# EAGLE board ES_Daisy_Field_Rev4 (EAGLE 9.6.1), part 1 of 2
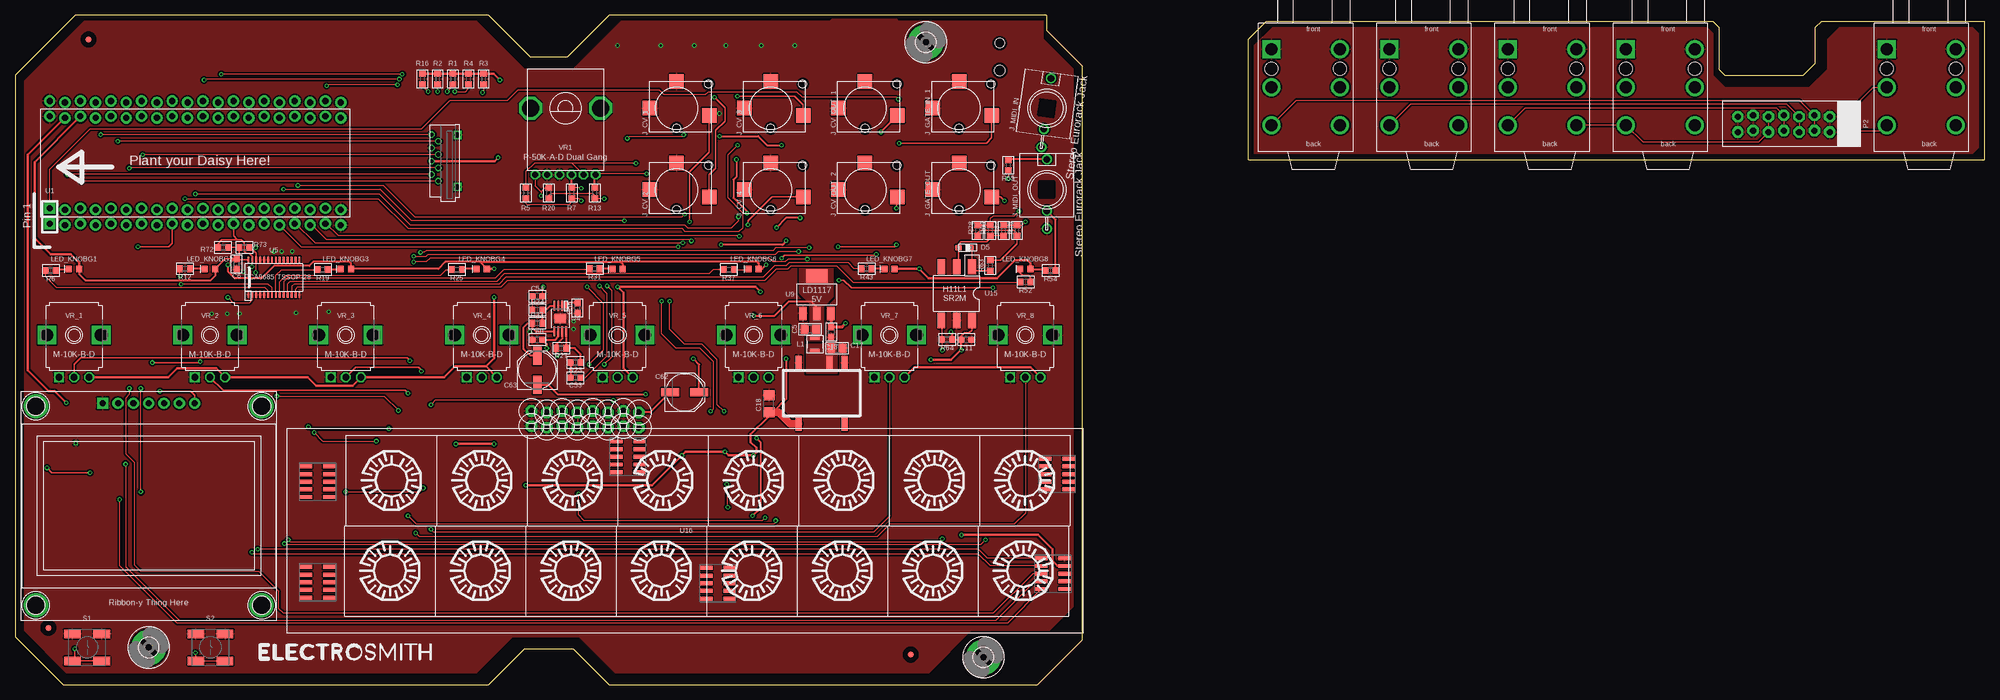
[diagram p0: board, top side]
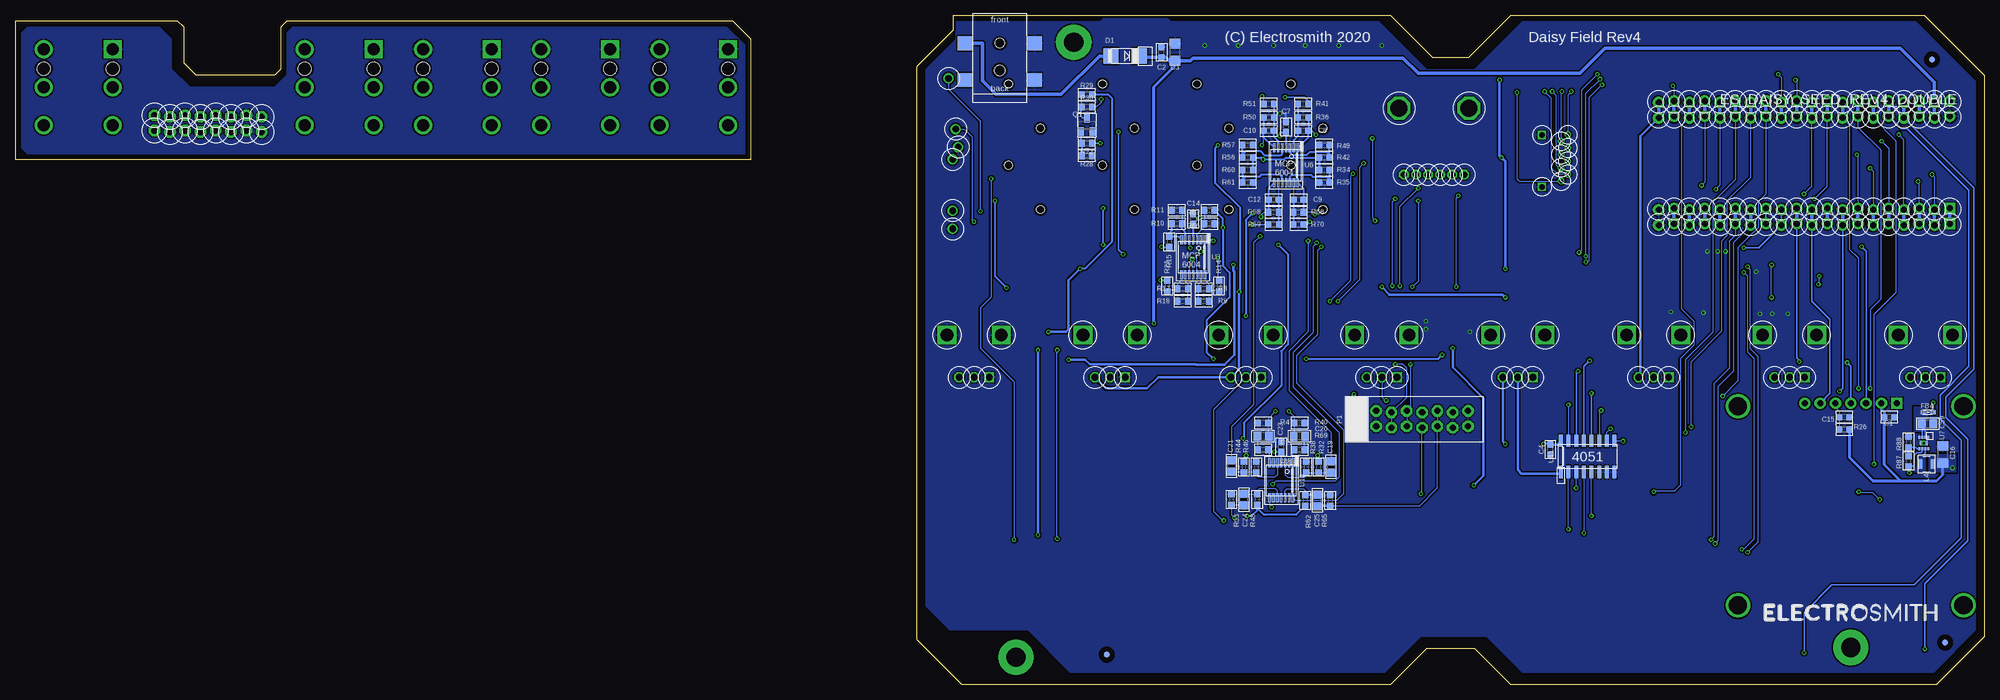
[diagram p1: board, bottom side, seen from below]

Size 326.5 x 111 mm. Coordinates in mm from the lower left corner, seen from the top.
Outline: 0,101 0,8 8,0 78.5,0 84.5,6 92.5,6 98.5,0 169.5,0 177,7.5 177,102.5 171,108.5 171,111 98.5,111 91.5,104 85.5,104 78.5,111 10,111 0,101
Outline: 204.5,87 326.5,87 326.5,110 299.5,110 298.5,109 298.5,103 296.5,101 283.5,101 282.5,102 282.5,109 281.5,110 207.5,110 204.5,107 204.5,87
Copper layers (1*16): Top 0.0356mm / dielectric 1.5011mm / Bottom 0.0356mm
Design rules "ES_DRC_MaskedVias": minimum track width 6mil, minimum drill 13mil, track to track 6mil, track to pad 6mil, pad to pad 6mil, via to via 6mil, smd to smd 6mil, copper to edge 15mil, drill to drill 6mil, minimum pad ring 7mil, minimum via ring 7mil, stop-mask expansion 3mil, vias tented up to drill 16mil, thermal gap 10mil
Net classes: 0 DEFAULT: width 0.102 mm, drill 0.2 mm, clearance 0.102 mm; 1 POWER: width 0.102 mm, drill 0.2 mm, clearance 0.102 mm

## Footprints (pad centres in the part's own frame; a part is rotated, then mirrored left to right if it is on the bottom)
C0603 = smd 1.1 x 1: 1 -0.85,0; 2 0.85,0
C1206 = smd 1.6 x 1.8: 1 -1.4,0; 2 1.4,0
C0805 = smd 1.3 x 1.5: 1 -0.95,0; 2 0.95,0
PANASONIC_D = smd 3 x 1.4: + 2.4,0; - -2.4,0
SMADIODE = smd 2.54 x 2.54: A 2.349,0; C -2.349,0
SOD-323F = smd 1 x 0.8: A 1,0; C -1,0
WUERTH-ELEKTRONIK_0603 = smd 0.85 x 0.7: 1 -0.9,0; 2 0.7,0
FIDUCIAL_1MM = smd 1 x 1: 1 0,0
32-PAD = drill 3.2 pad 5.842: B3,2 0,0
WQP-DC0500 = smd 2.3 x 2.5: 1 3.7,5.75; 2 3.7,-5.75; 3 -2.4,-5.75; 4 -2.4,5.75 | hole 1.6: -2.4,0 | hole 1.8: 2.1,0
WQP-PJ6110 = drill 2 square: 1 -6.35,-7 | drill 2: 2 6.25,-7; 3 -0.05,-7; 4 -6.35,4.4; 5 6.25,4.4; 6 -0.05,4.4 | hole 2.2: -3.1,4.4; -3.1,-7
SMT_JACK = smd 2.4 x 2.4: 1 -4.4,0; 2 0,4.4; 3 5.4,-1.2 | hole 1.35: 5.307,4.01; 0,-3.302
STEREO_JACK_3.5MM = drill 1.1: GND 0,-6.5; RING 0,-3.5; TIP 0,5
BOURNS_SRP2010 = smd 0.559 x 1.6: P$1 -1.003,0; P$2 1.003,0
DIODE_0603 = smd 1 x 1.1: ANODE 0.85,0; CATHODE -0.85,0
2X8_LOCK = drill 1.016 pad 1.88 octagon: 1 -1.397,8.89; 2 1.143,8.89; 3 -1.143,6.35; 4 1.397,6.35; 5 -1.397,3.81; 6 1.143,3.81; 7 -1.143,1.27; 8 1.397,1.27; 9 -1.397,-1.27; 10 1.143,-1.27; 11 -1.143,-3.81; 12 1.397,-3.81; 13 -1.397,-6.35; 14 1.143,-6.35; 15 -1.143,-8.89; 16 1.397,-8.89
SOT23-BEC = smd 1 x 1.4: B -0.95,-1.1; C 0,1.1; E 0.95,-1.1
R0603 = smd 1 x 1.1: 1 -0.85,0; 2 0.85,0
TL3301SPF160QJ = smd 2.794 x 1.397: 1 -2.413,-2.248; 2 2.413,-2.248; 3 -2.413,2.248; 4 2.413,2.248
ES_DAISY_SEED_DOUBLE = drill 1.016 pad 1.88 square: 1 -7.493,24.13; B1 -10.033,24.13 | drill 1.016 pad 1.88: 2 -7.747,21.59; 3 -7.493,19.05; 4 -7.747,16.51; 5 -7.493,13.97; 6 -7.747,11.43; 7 -7.493,8.89; 8 -7.747,6.35; 9 -7.493,3.81; 10 -7.747,1.27; 11 -7.493,-1.27; 12 -7.747,-3.81; 13 -7.493,-6.35; 14 -7.747,-8.89; 15 -7.493,-11.43; 16 -7.747,-13.97; 17 -7.493,-16.51; 18 -7.747,-19.05; 19 -7.493,-21.59; 20 -7.747,-24.13; 21 7.493,-24.13; 22 7.747,-21.59; 23 7.493,-19.05; 24 7.747,-16.51; 25 7.493,-13.97; 26 7.747,-11.43; 27 7.493,-8.89; 28 7.747,-6.35; 29 7.493,-3.81; 30 7.747,-1.27; 31 7.493,1.27; 32 7.747,3.81; 33 7.493,6.35; 34 7.747,8.89; 35 7.493,11.43; 36 7.747,13.97; 37 7.493,16.51; 38 7.747,19.05; 39 7.493,21.59; 40 7.747,24.13; B2 -10.287,21.59; B3 -10.033,19.05; B4 -10.287,16.51; B5 -10.033,13.97; B6 -10.287,11.43; B7 -10.033,8.89; B8 -10.287,6.35; B9 -10.033,3.81; B10 -10.287,1.27; B11 -10.033,-1.27; B12 -10.287,-3.81; B13 -10.033,-6.35; B14 -10.287,-8.89; B15 -10.033,-11.43; B16 -10.287,-13.97; B17 -10.033,-16.51; B18 -10.287,-19.05; B19 -10.033,-21.59; B20 -10.287,-24.13; B21 10.033,-24.13; B22 10.287,-21.59; B23 10.033,-19.05; B24 10.287,-16.51; B25 10.033,-13.97; B26 10.287,-11.43; B27 10.033,-8.89; B28 10.287,-6.35; B29 10.033,-3.81; B30 10.287,-1.27; B31 10.033,1.27; B32 10.287,3.81; B33 10.033,6.35; B34 10.287,8.89; B35 10.033,11.43; B36 10.287,13.97; B37 10.033,16.51; B38 10.287,19.05; B39 10.033,21.59; B40 10.287,24.13
VERT_MICROSD_CENTERED = drill 0.9 square: GND1 -3.9,-1.55; GND2 4.7,-1.55 | drill 0.7: P$1 -2.95,1.62; P$2 -1.85,2.72; P$3 -0.75,1.62; P$4 0.35,2.72; P$5 1.45,1.62; P$6 2.55,2.72; P$7 3.65,1.62; P$8 4.75,2.72
TSSOP-14 = smd 0.45 x 1.5: 1 -1.95,-2.9; 2 -1.3,-2.9; 3 -0.65,-2.9; 4 0,-2.9; 5 0.65,-2.9; 6 1.3,-2.9; 7 1.95,-2.9; 8 1.95,2.9; 9 1.3,2.9; 10 0.65,2.9; 11 0,2.9; 12 -0.65,2.9; 13 -1.3,2.9; 14 -1.95,2.9
MSOP_8_PWRPAD = smd 1.6 x 0.4: 1 -2.095,0.975; 2 -2.095,0.325; 3 -2.095,-0.325; 4 -2.095,-0.975; 5 2.095,-0.975; 6 2.095,-0.325; 7 2.095,0.325; 8 2.095,0.975 | smd 1.57 x 1.89: 9 0,0
TSSOP-28 = smd 0.305 x 0.991: 1 -4.225,-2.918; 2 -3.575,-2.918; 3 -2.925,-2.918; 4 -2.275,-2.918; 5 -1.625,-2.918; 6 -0.975,-2.918; 7 -0.325,-2.918; 8 0.325,-2.918; 9 0.975,-2.918; 10 1.625,-2.918; 11 2.275,-2.918; 12 2.925,-2.918; 13 3.575,-2.918; 14 4.225,-2.918; 15 4.225,2.918; 16 3.575,2.918; 17 2.925,2.918; 18 2.275,2.918; 19 1.625,2.918; 20 0.975,2.918; 21 0.325,2.918; 22 -0.325,2.918; 23 -0.975,2.918; 24 -1.625,2.918; 25 -2.275,2.918; 26 -2.925,2.918; 27 -3.575,2.918; 28 -4.225,2.918
WSON-8 = smd 0.5 x 0.28: 1 -0.95,0.75; 2 -0.95,0.25; 3 -0.95,-0.25; 4 -0.95,-0.75; 5 0.95,-0.75; 6 0.95,-0.25; 7 0.95,0.25; 8 0.95,0.75 | drill 0.33 pad 0.61 square: P$1 0,0 | smd 0.7 x 1.3: P$9 0,0
ER-OLEDM015-2 = drill 1.016 pad 1.88 square: 1 -7.62,17 | drill 1.016 pad 1.88: 2 -5.08,17; 3 -2.54,17; 4 0,17; 5 2.54,17; 6 5.08,17; 7 7.62,17 | drill 3: MNT1 -18.7,16.5; MNT2 18.7,16.5; MNT3 -18.7,-16.5; MNT4 18.7,-16.5
SOT223 = smd 2.235 x 1.219: 1 3.099,-2.311; 2 3.099,0; 3 3.099,2.311 | smd 2.2 x 3.6: TAB -3.099,0
SO-16 = smd 0.66 x 2.032: 1 -4.445,-2.591; 2 -3.175,-2.591; 3 -1.905,-2.591; 4 -0.635,-2.591; 5 0.635,-2.591; 6 1.905,-2.591; 7 3.175,-2.591; 8 4.445,-2.591; 9 4.445,2.591; 10 3.175,2.591; 11 1.905,2.591; 12 0.635,2.591; 13 -0.635,2.591; 14 -1.905,2.591; 15 -3.175,2.591; 16 -4.445,2.591
DIL06_GULLWING = smd 1.27 x 2.54: 1 -2.54,-4.445; 2 0,-4.445; 3 2.54,-4.445; 4 2.54,4.445; 5 0,4.445; 6 -2.54,4.445
ES_KEYBOARD_SM_REV2_ALIGNED = smd 1.98 x 0.65: 1A -59.015,9.67; 1A1 -59.65,-6.84; 1A2 -3.453,11.258; 1A3 11.47,-9.697; 1A4 62.905,11.098; 1B 62.905,-5.57; 2A -59.015,8.4; 2A1 -59.65,-8.11; 2A2 -3.453,9.988; 2A3 11.47,-10.967; 2A4 62.905,9.828; 2B 62.905,-6.84; 3A -59.015,7.13; 3A1 -59.65,-9.38; 3A2 -3.453,8.717; 3A3 11.47,-12.238; 3A4 62.905,8.558; 3B 62.905,-8.11; 4A -59.015,5.86; 4A1 -59.65,-10.65; 4A2 -3.453,7.447; 4A3 11.47,-13.508; 4A4 62.905,7.288; 4B 62.905,-9.38; 5A -59.015,4.59; 5A1 -59.65,-11.92; 5A2 -3.453,6.178; 5A3 11.47,-14.777; 5A4 62.905,6.018; 5B 62.905,-10.65; 6A -62.825,4.59; 6A1 -63.46,-11.92; 6A2 -7.263,6.178; 6A3 7.66,-14.777; 6A4 59.095,6.018; 6B 59.095,-10.65; 7A -62.825,5.86; 7A1 -63.46,-10.65; 7A2 -7.263,7.447; 7A3 7.66,-13.508; 7A4 59.095,7.288; 7B 59.095,-9.38; 8A -62.825,7.13; 8A1 -63.46,-9.38; 8A2 -7.263,8.717; 8A3 7.66,-12.238; 8A4 59.095,8.558; 8B 59.095,-8.11; 9A -62.825,8.4; 9A1 -63.46,-8.11; 9A2 -7.263,9.988; 9A3 7.66,-10.967; 9A4 59.095,9.828; 9B 59.095,-6.84; 10A -62.825,9.67; 10A1 -63.46,-6.84; 10A2 -7.263,11.258; 10A3 7.66,-9.697; 10A4 59.095,11.098; 10B 59.095,-5.57
XP_POWER_ISEXXXXA = smd 1 x 2.28: P$1 -3.81,-5.08; P$2 -1.27,-5.08; P$4 3.81,-5.08; P$5 3.81,5.08; P$8 -3.81,5.08
BOURNS_PTV112_SILK = drill 1 pad 1.6 octagon: 1 -3,-11; 1P -1,-11; 2 -5,-11; 2P 1,-11; 3 5,-11; 3P 3,-11 | drill 2.8 pad 3.81 octagon: P$1 5.8,0; P$5 -5.8,0
9MM_SNAP-IN_POT_SILK = drill 1.1 square: 1 -2.5,-7 | drill 1.1 octagon: 2 0,-7; 3 2.5,-7 | drill 2.1 square: CHASSIS1 -4.5,0; CHASSIS2 4.5,0

## Placement (x,y rotation side)
C1  100NF  [C0603]  15.77,44.36 180 bottom
C2  100NF  [C0603]  136.42,104.84 90 bottom
C3  22UF  [C1206]  134.2,104.84 90 bottom
C4  100NF  [C0603]  71.97,38.96 90 bottom
C5  22UF  [C0805]  131.82,58.96 180 top
C6  100NF  [C0603]  36.73,69.76 90 top
C7  100NF  [C0603]  115.78,92.46 270 bottom
C8  10NF  [C0603]  112.93,91.82 0 bottom
C9  10NF  [C0603]  113.72,80.39 0 bottom
C10  10NF  [C0603]  118.64,91.82 180 bottom
C11  100NF  [C0603]  157.69,57.22 0 top
C12  10NF  [C0603]  117.85,80.39 180 bottom
C13  100NF  [C0603]  135.31,58.48 270 top
C14  100NF  [C0603]  131.18,77.22 270 bottom
C15  2.2UF  [C0603]  23.23,44.36 180 bottom
C16  22UF  [C1206]  6.88,38.17 90 bottom
C17  10UF  [C0805]  136.26,55.79 0 top
C18  22UF  [C1206]  124.99,46.58 90 top
C19  10UF  [C0805]  108.32,36.1 270 bottom
C20  10UF  [C0805]  113.56,41.18 180 bottom
C21  10UF  [C0805]  124.83,36.26 270 bottom
C22  10UF  [C0805]  119.59,41.18 0 bottom
C23  100NF  [C0603]  116.58,39.44 90 bottom
C24  10UF  [C0805]  122.77,30.7 90 bottom
C25  10UF  [C0805]  110.55,30.55 90 bottom
C53  470NF  [C0603]  92.92,50.86 180 top
C54  470NF  [C0603]  86.58,64.36 180 top
C56  100NF  [C0603]  93.24,62.45 90 top
C59  10UF  [C0805]  9.42,43.25 0 bottom
C60  100NF  [C0603]  86.58,57.22 0 top
C62  220UF PANASONIC D8  [PANASONIC_D]  111.02,48.48 0 top
C63  220UF PANASONIC D8  [PANASONIC_D]  86.58,52.13 90 top
D1  S1B  [SMADIODE]  142.46,104.2 180 bottom
D5  1N4148WS  [SOD-323F]  157.38,72.45 180 top
FB4  FB  [WUERTH-ELEKTRONIK_0603]  9.42,45.15 180 bottom
FD1  FIDUCIAL  [FIDUCIAL_1MM]  12.18,106.97 0 top
FD2  FIDUCIAL  [FIDUCIAL_1MM]  5.52,9.44 0 top
FD3  FIDUCIAL  [FIDUCIAL_1MM]  148.5,5 0 top
FD4  FIDUCIAL  [FIDUCIAL_1MM]  8.71,103.64 0 bottom
FD5  FIDUCIAL  [FIDUCIAL_1MM]  6.5,7 0 bottom
FD6  FIDUCIAL  [FIDUCIAL_1MM]  145.5,5 0 bottom
H1  MOUNT-PAD-ROUND3.2  [32-PAD]  160.54,4.56 0 top
H2  MOUNT-PAD-ROUND3.2  [32-PAD]  22.16,6.19 0 top
H3  MOUNT-PAD-ROUND3.2  [32-PAD]  151,106.5 0 top
J7  SMT GUITAR DC JACK  [WQP-DC0500]  163.26,103.94 270 bottom
J8  PTH Switching Stereo Guitar Jack  [WQP-PJ6110]  274.08,99 270 top
J9  PTH Switching Stereo Guitar Jack  [WQP-PJ6110]  254.48,99 270 top
J10  PTH Switching Stereo Guitar Jack  [WQP-PJ6110]  317.34,99 270 top
J12  PTH Switching Stereo Guitar Jack  [WQP-PJ6110]  234.88,99 270 top
J13  PTH Switching Stereo Guitar Jack  [WQP-PJ6110]  215.28,99 270 top
J_CV_1  Eurorack Jack  [SMT_JACK]  109.66,95.56 0 top
J_CV_2  Eurorack Jack  [SMT_JACK]  109.66,82.08 0 top
J_CV_3  Eurorack Jack  [SMT_JACK]  125.28,95.56 0 top
J_CV_4  Eurorack Jack  [SMT_JACK]  125.28,82.08 0 top
J_CV_OUT_1  Eurorack Jack  [SMT_JACK]  140.9,95.56 0 top
J_CV_OUT_2  Eurorack Jack  [SMT_JACK]  140.9,82.08 0 top
J_GATE_IN_1  Eurorack Jack  [SMT_JACK]  156.51,95.56 0 top
J_GATE_OUT  Eurorack Jack  [SMT_JACK]  156.51,82.08 0 top
J_MIDI_IN  Stereo Eurorack Jack  [STEREO_JACK_3.5MM]  171.04,95.56 352 top
J_MIDI_OUT  Stereo Eurorack Jack  [STEREO_JACK_3.5MM]  171.04,82.08 0 top
L1  2.2uH  [BOURNS_SRP2010]  132.61,56.42 270 top
L4  2.2UH SRP2010-2R2M  [BOURNS_SRP2010]  9.58,36.58 0 bottom
LED_KNOBG1  YELLOW LED R0603  [DIODE_0603]  9.78,68.93 0 top
LED_KNOBG2  YELLOW LED R0603  [DIODE_0603]  32.31,68.93 0 top
LED_KNOBG3  YELLOW LED R0603  [DIODE_0603]  54.84,68.93 0 top
LED_KNOBG4  YELLOW LED R0603  [DIODE_0603]  77.37,68.93 0 top
LED_KNOBG5  YELLOW LED R0603  [DIODE_0603]  99.9,68.93 0 top
LED_KNOBG6  YELLOW LED R0603  [DIODE_0603]  122.43,68.93 0 top
LED_KNOBG7  YELLOW LED R0603  [DIODE_0603]  144.96,68.93 0 top
LED_KNOBG8  YELLOW LED R0603  [DIODE_0603]  167.49,68.93 0 top
P1  2X8 PTH Male Header  [2X8_LOCK]  94.5,44 90 bottom
P2  2X8 PTH Male Header  [2X8_LOCK]  294.5,93 270 top
Q1  MMBT3904  [SOT23-BEC]  148.81,92.78 0 bottom
R1  47K  [R0603]  72.61,100.39 90 top
R2  47K  [R0603]  70.06,100.39 90 top
R3  47K  [R0603]  77.69,100.39 90 top
R4  47K  [R0603]  75.14,100.39 90 top
R5  0R-DNI  [R0603]  84.67,81.5 90 top
R6  1K  [R0603]  5.93,68.65 0 top
R7  0R  [R0603]  92.29,81.5 90 top
R8  100K  [R0603]  129.44,65.63 0 bottom
R9  200K  [R0603]  129.44,63.56 180 bottom
R10  100K  [R0603]  133.88,76.42 180 bottom
R11  200K  [R0603]  133.88,78.65 0 bottom
R12  1K  [R0603]  28.16,68.96 0 top
R13  0R-DNI  [R0603]  96.1,81.5 90 top
R14  100R  [R0603]  126.9,66.1 90 bottom
R15  100R  [R0603]  135.15,73.41 270 bottom
R16  47K  [R0603]  67.53,100.39 90 top
R17  100K  [R0603]  132.93,65.63 180 bottom
R18  200K  [R0603]  132.93,63.56 0 bottom
R19  1K  [R0603]  51.02,68.8 0 top
R20  0R  [R0603]  88.48,81.5 90 top
R21  100R  [R0603]  135.47,66.1 90 bottom
R22  100K  [R0603]  148.81,89.76 180 bottom
R23  22K  [R0603]  92.92,53.41 180 top
R24  22K  [R0603]  86.58,62.14 180 top
R25  1K  [R0603]  73.24,68.8 0 top
R26  10K  [R0603]  23.23,42.29 0 bottom
R27  33K  [R0603]  90.54,55.79 0 top
R28  1M  [R0603]  148.81,87.69 180 bottom
R29  2K  [R0603]  148.81,97.86 0 bottom
R30  1K  [R0603]  148.81,95.79 180 bottom
R31  1K  [R0603]  96.1,68.96 0 top
R32  2M  [R0603]  110.39,36.1 90 bottom
R33  33K  [R0603]  86.58,59.91 0 top
R34  100K  [R0603]  109.44,85.31 180 bottom
R35  33K  [R0603]  109.44,83.25 180 bottom
R36  33K  [R0603]  112.93,94.05 0 bottom
R37  1K  [R0603]  118.33,68.8 0 top
R38  2M  [R0603]  112.45,36.1 270 bottom
R40  2M  [R0603]  113.56,43.4 180 bottom
R41  100K  [R0603]  112.93,96.27 180 bottom
R42  100K  [R0603]  109.44,87.38 180 bottom
R43  1K  [R0603]  141.19,68.96 0 top
R44  2M  [R0603]  122.77,36.1 90 bottom
R46  2M  [R0603]  120.71,36.1 270 bottom
R47  2M  [R0603]  119.59,43.4 0 bottom
R48  2M  [R0603]  120.55,30.7 270 bottom
R49  33K  [R0603]  109.44,89.44 180 bottom
R50  33K  [R0603]  118.64,94.05 180 bottom
R51  100K  [R0603]  118.64,96.27 0 bottom
R52  1K  [R0603]  167.54,66.74 0 top
R53  2M  [R0603]  124.83,30.7 270 bottom
R54  33R  [R0603]  171.66,68.65 0 top
R55  10R  [R0603]  164.68,86.11 270 top
R56  100K  [R0603]  122.14,87.38 0 bottom
R57  33K  [R0603]  122.14,89.44 0 bottom
R58  33K  [R0603]  117.85,78.33 180 bottom
R59  100K  [R0603]  117.85,76.27 0 bottom
R60  100K  [R0603]  122.14,85.31 0 bottom
R61  33K  [R0603]  122.14,83.25 0 bottom
R62  2M  [R0603]  112.61,30.55 270 bottom
R63  220R  [R0603]  161.68,69.5 90 top
R64  270R  [R0603]  154.52,57.22 180 top
R65  2M  [R0603]  108.48,30.55 270 bottom
R66  100K  [R0603]  128.49,76.42 180 bottom
R67  100K  [R0603]  128.49,78.65 0 bottom
R68  33K  [R0603]  113.72,78.33 0 bottom
R69  100R  [R0603]  113.56,38.96 180 bottom
R70  100K  [R0603]  113.72,76.27 180 bottom
R71  100R  [R0603]  119.59,38.96 0 bottom
R72  4K7  [R0603]  34.5,72.5 180 top
R73  4K7  [R0603]  38,72.5 0 top
R78  DNI 0R  [R0603]  159.6,75.31 90 top
R79  0R  [R0603]  166.11,75.31 90 top
R83  0R  [R0603]  161.66,75.31 90 top
R84  DNI 0R  [R0603]  163.89,75.31 90 top
R87  47K  [R0603]  12.6,37.05 270 bottom
R88  15K  [R0603]  12.6,40.23 270 bottom
S1  SMT Mini Button  [TL3301SPF160QJ]  11.93,6.19 0 top
S2  SMT Mini Button  [TL3301SPF160QJ]  32.39,6.19 0 top
U1  ES_DAISY_SEED_REV4_DOUBLE  [ES_DAISY_SEED_DOUBLE]  29.87,86.47 90 top
U2  MicroSD Vertical  [VERT_MICROSD_CENTERED]  71.79,86.43 90 top
U3  MCP6004  [TSSOP-14]  131.18,70.87 180 bottom
U4  TPA6110 MSOP-8  [MSOP_8_PWRPAD]  90.39,60.71 270 top
U5  PCA9685 TSSOP-28  [TSSOP-28]  42.92,67.53 0 top
U6  MCP6004  [TSSOP-14]  115.78,86.11 180 bottom
U7  TPS62170 WSON-8  [WSON-8]  10.06,40.07 270 bottom
U8  OLED_DISPLAY  [ER-OLEDM015-2]  22.16,29.66 0 top
U9  LD1117-5V  [SOT223]  132.93,64.68 270 top
U10  OPA1654  [TSSOP-14]  116.58,33.88 180 bottom
U11  CD4051 SO-16  [SO-16]  65.78,37.85 0 bottom
U15  OPTO ISOLATOR  [DIL06_GULLWING]  156.11,64.84 180 top
U16  ES_KEYBOARD_SM_REV2_ALIGNED  [ES_KEYBOARD_SM_REV2_ALIGNED]  111.16,25.55 180 top
U$1  [ENCLOSURE_1590DD]  88.5,55 90 top
U$2  [ENCLOSURE_1590DD]  288.5,55 90 top
U$3  [ES_TEXT_3X30MM]  54.66,5.38 0 top
U$4  POWER_ISOLATE  [XP_POWER_ISEXXXXA]  133.72,48.33 180 top
U$7  [ES_TEXT_3X30MM]  22.29,11.89 0 bottom
VR1  P-50K-A-D Dual Gang  [BOURNS_PTV112_SILK]  91.24,95.56 0 top
VR_1  M-10K-B-D  [9MM_SNAP-IN_POT_SILK]  9.78,57.96 0 top
VR_2  M-10K-B-D  [9MM_SNAP-IN_POT_SILK]  32.31,57.96 0 top
VR_3  M-10K-B-D  [9MM_SNAP-IN_POT_SILK]  54.84,57.96 0 top
VR_4  M-10K-B-D  [9MM_SNAP-IN_POT_SILK]  77.37,57.96 0 top
VR_5  M-10K-B-D  [9MM_SNAP-IN_POT_SILK]  99.9,57.96 0 top
VR_6  M-10K-B-D  [9MM_SNAP-IN_POT_SILK]  122.43,57.96 0 top
VR_7  M-10K-B-D  [9MM_SNAP-IN_POT_SILK]  144.96,57.96 0 top
VR_8  M-10K-B-D  [9MM_SNAP-IN_POT_SILK]  167.49,57.96 0 top

## Library data of the parts
C1 C2 C4 C6-C15 C23 C53 C54 C56 C60 = Electrosmith-Passives; PACKAGE: C0603
C3 C16 C18 = Electrosmith-Passives; PACKAGE: C1206
C5 C17 C19-C22 C24 C25 C59 = Electrosmith-Passives; PACKAGE: C0805
C62 C63 L1 L4 = Electrosmith-Passives
D1 = Electrosmith-Semiconductors; BIN#: 12-006; IPN: S1B; MPN: S1B; PACKAGE: SMA
D5 = Electrosmith-Semiconductors; PACKAGE: SOD-323
FB4 = Electrosmith-Passives; BIN#: 8-047; IPN: FB R0603; MPN: MI0603J601R-10; PACKAGE: R0603
FD1-FD6 H1-H3 J7 = Electrosmith-Connectors
J8-J10 J12 J13 J_CV_1-J_CV_4 J_CV_OUT_1 J_CV_OUT_2 J_GATE_IN_1 J_GATE_OUT J_MIDI_IN J_MIDI_OUT U2 VR1 VR_1-VR_8 = Electrosmith-Interface
LED_KNOBG1-LED_KNOBG8 = Electrosmith-Interface; COLOR: YELLOW; MPN: APT1608LSYCK/J3-PRV
P1 P2 = Electrosmith-Connectors; LABEL: solder on this side
Q1 = Electrosmith-Semiconductors
R1-R38 R40-R44 R46-R73 R78 R79 R83 R84 R87 R88 = Electrosmith-Passives; PACKAGE: R0603
S1 S2 = Electrosmith-Interface; BIN#: 24-010; IPN: SMT Mini Button; MPN: TL3301SPF160QJ
U1 U16 = Electrosmith-Boards
U3 U6 = Electrosmith-IC; BIN#: N/A; IPN: MCP6004 TSSOP-14; MPN: MCP6004T-E/ST; PACKAGE: TSSOP-14
U4 U10 U11 = Electrosmith-IC
U5 = Electrosmith-IC; BIN#: 16-016; IPN: PCA9685 TSSOP-28; MPN: PCA9685PW,118; PACKAGE: TSSOP-28
U7 = Electrosmith-IC; MPN: TPS62170
U8 = Electrosmith-Interface; IPN: 1.5" Display Module PTH; MPN: ER-OLEDM015-2W-SPI-I2C
U9 = Electrosmith-Power; BIN#: 12-025; IPN: LD1117-5V; MPN: LD1117S50CTR; PACKAGE: SOT-223
U15 = Electrosmith-IC; MPN: H11L1SR2M
U$1 U$2 = Electrosmith-Misc
U$3 U$7 = Electrosmith-Logo
U$4 = Electrosmith-IC; MPN: ISE2405A

## Nets
+3V3_A: C4.2 C7.2 U1.21 U1.B21 U6.4 U11.16 VR_1.3 VR_2.3 VR_3.3 VR_4.3 VR_5.3 VR_6.3 VR_7.3 VR_8.3
+3V3_D: C6.2 C11.1 LED_KNOBG1.ANODE LED_KNOBG2.ANODE LED_KNOBG3.ANODE LED_KNOBG4.ANODE LED_KNOBG5.ANODE LED_KNOBG6.ANODE LED_KNOBG7.ANODE LED_KNOBG8.ANODE R1.2 R2.2 R3.2 R4.2 R16.2 R29.2 R54.1 R64.1 R72.1 R73.1 U1.38 U1.B38 U2.P$4 U5.2 U5.28 U15.6 U16.7A
+3V3_OLED: C1.2 C16.1 L4.P$2 R26.2 R87.2 U7.6 U8.2
+5V: C5.1 L1.P$1 R34.2 R42.2 R56.2 R60.2 U9.2 U9.TAB
+5V_ISOL: C14.2 C18.1 C23.1 C60.2 R32.2 R44.2 R67.2 U3.4 U4.6 U10.4 U$4.P$5
+9V: C2.1 C3.1 C13.1 D1.C FB4.1 U1.39 U1.B39 U9.3
ADC_CV_1: C9.2 R68.2 U1.24 U1.B24 U6.14
ADC_CV_2: C8.2 R36.2 U1.25 U1.B25 U6.1
ADC_CV_3: C10.2 R50.2 U1.32 U1.B32 U6.7
ADC_CV_4: C12.2 R58.2 U1.31 U1.B31 U6.8
AUDIO_IN_1: U1.16 U1.B16 U10.13 U10.14
AUDIO_IN_1_EXT: C25.1 P1.11 P1.12 R65.2
AUDIO_IN_1_JACKS: J8.2 J9.5 P2.11 P2.12
AUDIO_IN_2: U1.17 U1.B17 U10.8 U10.9
AUDIO_IN_2_EXT: C24.1 P1.9 P1.10 R53.2
AUDIO_IN_2_JACKS: J9.2 P2.9 P2.10
AUDIO_OUT_1: C19.1 U1.18 U1.B18
AUDIO_OUT_1_EXT: C20.2 R5.2 R40.2 VR1.3P
AUDIO_OUT_1_JACKS: J12.2 P2.7 P2.8
AUDIO_OUT_2: C21.1 U1.19 U1.B19
AUDIO_OUT_2_EXT: C22.2 R13.2 R47.2 VR1.3
AUDIO_OUT_2_JACKS: J13.2 P2.5 P2.6
CD4021_CLK: U1.35 U1.B35 U16.2A
CD4021_CS: U1.34 U1.B34 U16.3A
CD4021_D1: U1.33 U1.B33 U16.1A
CV_OUT_1: J_CV_OUT_1.3 R14.2
CV_OUT_2: J_CV_OUT_2.3 R15.2
CV_OUT_3: J_GATE_OUT.3 R21.2
DAC_OUT_1: U1.30 U1.B30 U3.12
DAC_OUT_2: U1.29 U1.B29 U3.5
GATE_IN: R30.1 U1.1 U1.B1
GATE_JACK_IN: J_GATE_IN_1.3 R22.1
GATE_OUT: U1.22 U1.B22 U3.10
GND: C1.1 C2.2 C3.2 C4.1 C5.2 C6.1 C7.1 C11.2 C13.2 C14.1 C15.1 C16.2 C17.2 C18.2 C23.2 C56.1 C59.2 C60.1 H3.B3,2 J7.1 J7.4 J_CV_1.1 J_CV_1.2 J_CV_2.1 J_CV_2.2 J_CV_3.1 J_CV_3.2 J_CV_4.1 J_CV_4.2 J_CV_OUT_1.1 J_CV_OUT_2.1 J_GATE_IN_1.1 J_GATE_OUT.1 J_MIDI_IN.GND J_MIDI_OUT.GND P1.3 P1.4 P1.13 P1.14 P1.15 P1.16 Q1.E R9.1 R11.1 R18.1 R28.1 R35.2 R38.1 R40.1 R46.1 R47.1 R49.2 R53.1 R57.2 R61.2 R65.1 R66.1 R88.1 S1.3 S1.4 S2.3 S2.4 U1.20 U1.40 U1.B20 U1.B40 U2.GND1 U2.GND2 U2.P$6 U3.11 U4.2 U4.3 U4.9 U5.1 U5.3 U5.4 U5.5 U5.14 U5.23 U5.24 U5.25 U6.11 U7.1 U7.4 U7.P$1 U7.P$9 U8.1 U9.1 U10.11 U11.6 U11.7 U11.8 U15.5 U16.6A U$4.P$1 U$4.P$4 VR1.1 VR1.1P VR_1.1 VR_2.1 VR_3.1 VR_4.1 VR_5.1 VR_6.1 VR_7.1 VR_8.1 VR_8.CHASSIS1 VR_8.CHASSIS2
GND_2: J8.1 J8.4 J9.1 J9.4 J10.1 J10.4 J12.1 J12.4 J13.1 J13.4 P2.3 P2.4 P2.13 P2.14 P2.15 P2.16
HEADPHONE_OUT_L [DATA]: C62.- P1.2
HEADPHONE_OUT_R [DATA]: C63.- P1.1
HEADPHONE_WIPER_L [DATA]: C53.1 R7.2 VR1.2P
HEADPHONE_WIPER_R [DATA]: C54.1 R20.2 VR1.2
HP_OUT_L_EXT: J10.2 P2.2
HP_OUT_R_EXT: J10.3 P2.1
I2C1_SCL: R73.2 U1.12 U1.B12 U5.26 U16.5A
I2C1_SDA: R72.2 U1.13 U1.B13 U5.27 U16.4A
LED_KNOB_1_G: R6.1 U5.6
LED_KNOB_2_G: R12.1 U5.7
LED_KNOB_3_G: R19.1 U5.8
LED_KNOB_4_G: R25.1 U5.9
LED_KNOB_5_G: R31.1 U5.10
LED_KNOB_6_G: R37.1 U5.11
LED_KNOB_7_G: R43.1 U5.12
LED_KNOB_8_G: R52.1 U5.13
MIDI_IN_A: R63.2 R78.1 R79.1
MIDI_IN_B: D5.A R83.1 R84.1 U15.2
MIDI_IN_RING: J_MIDI_IN.RING R79.2 R84.2
MIDI_IN_TIP: J_MIDI_IN.TIP R78.2 R83.2
MUX_SEL_0: U1.28 U1.B28 U11.11
MUX_SEL_1: U1.27 U1.B27 U11.10
MUX_SEL_2: U1.26 U1.B26 U11.9
N$1: LED_KNOBG1.CATHODE R6.2
N$2: D1.A J7.3
N$3: R10.2 R15.1 U3.7
N$4: R8.2 R14.1 U3.14
N$5: R8.1 R9.2 U3.13
N$6: R34.1 R35.1 U6.12
N$7: R10.1 R11.2 U3.6
N$8: C8.1 R36.1 R41.2 U6.2
N$9: Q1.C R29.1 R30.2
N$10: J_CV_2.3 R41.1
N$11: R42.1 R49.1 U6.3
N$12 [DATA]: C54.2 R24.2
N$13: R17.2 R21.1 U3.8
N$14: R17.1 R18.2 U3.9
N$15: C17.1 L1.P$2 U$4.P$2
N$16: LED_KNOBG2.CATHODE R12.2
N$17: LED_KNOBG3.CATHODE R19.2
N$18: C19.2 R32.1 R38.2 U10.3
N$19 [DATA]: R23.1 R27.2 U4.8
N$20 [DATA]: R24.1 R33.2 U4.4
N$21: C10.1 R50.1 R51.2 U6.6
N$22: J_CV_3.3 R51.1
N$23: LED_KNOBG4.CATHODE R25.2
N$24: R69.2 U10.1 U10.2
N$25: R56.1 R57.1 U6.5
N$26: C12.1 R58.1 R59.2 U6.9
N$27: J_CV_4.3 R59.1
N$28: R60.1 R61.1 U6.10
N$29: LED_KNOBG5.CATHODE R31.2
N$30: C21.2 R44.1 R46.2 U10.5
N$32: Q1.B R22.2 R28.2
N$33: R71.2 U10.6 U10.7
N$34 [DATA]: C53.2 R23.2
N$35: LED_KNOBG6.CATHODE R37.2
N$36: C24.2 R48.1 U10.10
N$38: C25.2 R62.1 U10.12
N$39 [DATA]: C56.2 U4.1
N$40 [DATA]: C62.+ R27.1 U4.7
N$41 [DATA]: C63.+ R33.1 U4.5
N$42: R66.2 R67.1 U3.3
N$43: C20.1 R69.1
N$46: LED_KNOBG7.CATHODE R43.2
N$47: LED_KNOBG8.CATHODE R52.2
N$48: C22.1 R71.1
N$51: J_MIDI_OUT.TIP R55.1
N$52: J_MIDI_OUT.RING R54.2
N$54: C59.1 FB4.2 U7.2 U7.3
N$55: R87.1 R88.2 U7.5
N$57: L4.P$1 U7.7
N$77: D5.C R63.1 U15.1
N$108: C9.1 R68.1 R70.2 U6.13
N$110: J_CV_1.3 R70.1
OLED_CMD: U1.10 U1.B10 U8.6
OLED_RESET: C15.2 R26.1 U8.5
OUT_L_ATTEN: P1.7 P1.8 R5.1 R7.1
OUT_R_ATTEN: P1.5 P1.6 R13.1 R20.1
POT_1: U11.13 VR_1.2
POT_2: U11.14 VR_3.2
POT_3: U11.15 VR_5.2
POT_4: U11.12 VR_2.2
POT_5: U11.1 VR_4.2
POT_6: U11.5 VR_6.2
POT_7: U11.2 VR_7.2
POT_8: U11.4 VR_8.2
POT_MUX_ADC: U1.23 U1.B23 U11.3
SD_CK: U1.7 U1.B7 U2.P$5
SD_CMD: R1.1 U1.6 U1.B6 U2.P$3
SD_D0: R2.1 U1.5 U1.B5 U2.P$7
SD_D1: R16.1 U1.4 U1.B4 U2.P$8
SD_D2: R3.1 U1.3 U1.B3 U2.P$1
SD_D3: R4.1 U1.2 U1.B2 U2.P$2
SPI1_CS: U1.8 U1.B8 U8.7
SPI1_MOSI: U1.11 U1.B11 U8.4
SPI1_SCK: U1.9 U1.B9 U8.3
TAC_SWITCH_1: S1.1 S1.2 U1.37 U1.B37
TAC_SWITCH_2: S2.1 S2.2 U1.36 U1.B36
USART1_RX: R64.2 U1.15 U1.B15 U15.4
USART1_TX: R55.2 U1.14 U1.B14
V_AUDIOBIAS: R48.2 R62.2 U3.1 U3.2